# EAGLE board SipNPuff (EAGLE 9.7.0)
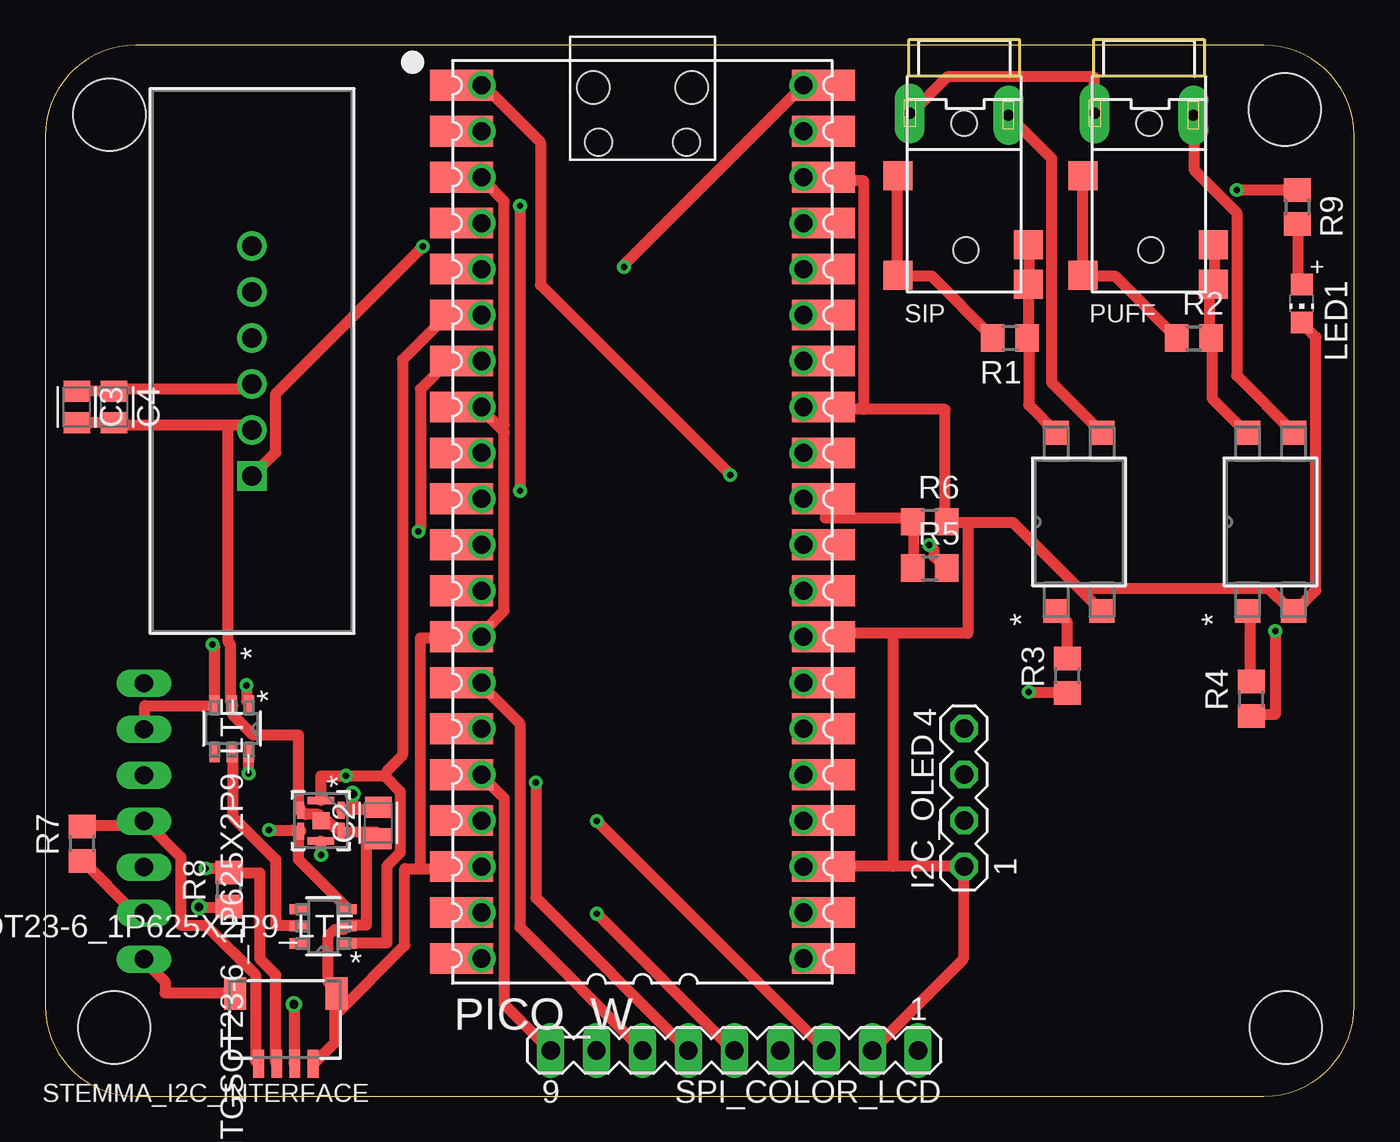
[diagram p0: board, top side]
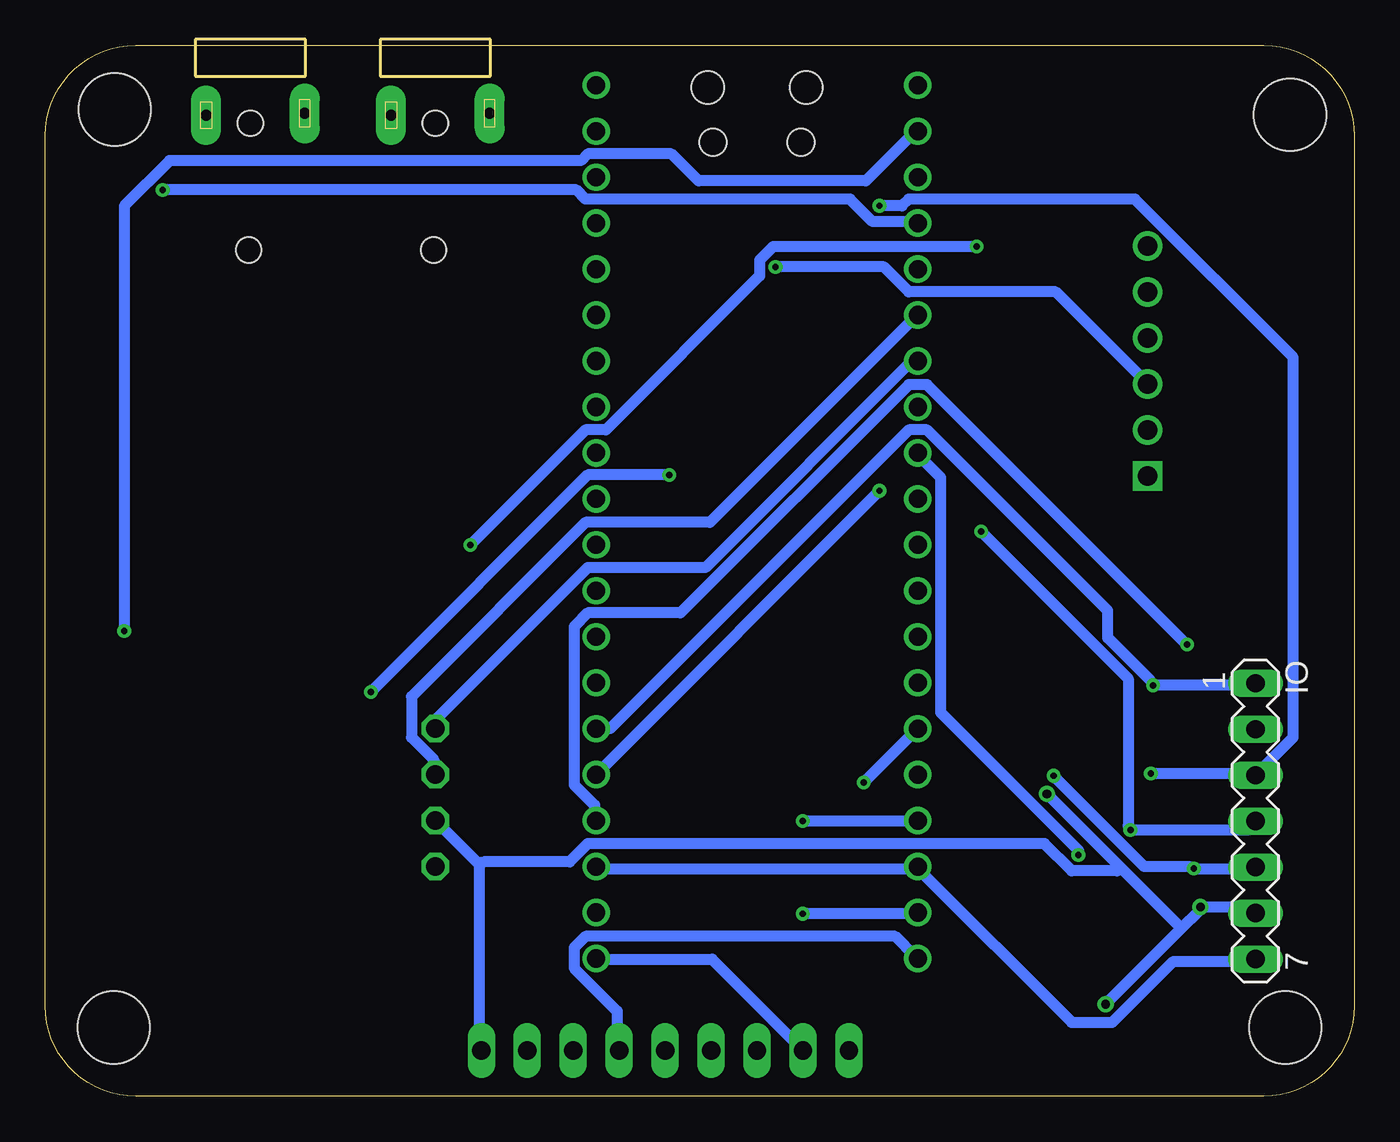
[diagram p1: board, bottom side, seen from below]

Size 72.37 x 58.09 mm. Coordinates in mm from the lower left corner, seen from the top.
Outline: 0,53.09 0,5 arc90 5,0 67.37,0 arc90 72.37,5 72.37,53.09 arc90 67.37,58.09 5,58.09 arc90 0,53.09
Copper layers (1*16): Top 0.035mm / dielectric 1.5mm / Bottom 0.035mm
Design rules "Fusion Electronics Design Rules": minimum track width 6mil, minimum drill 0.35mm, track to track 6mil, track to pad 6mil, pad to pad 6mil, via to via 6mil, smd to smd 6mil, copper to edge 40mil, drill to drill 6mil, minimum pad ring 10mil, minimum via ring 8mil, stop-mask expansion 4mil, vias tented up to drill 9999mil, thermal gap 10mil
Net classes: 1 power_2: width 0.305 mm; 3 Power: width 0.305 mm, drill 0.483 mm
Holes 4 mm at 3.81,3.81 68.58,3.81 68.53,54.54 3.55,54.25

## Footprints (pad centres in the part's own frame; a part is rotated, then mirrored left to right if it is on the bottom)
CAPC2012X110 = smd 1.165 x 1.465: 1 -0.875,0; 2 0.875,0
MA04-1 = drill 1.016 octagon: 1 1.27,1.27; 2 3.81,1.27; 3 6.35,1.27; 4 8.89,1.27
MA07-1 = drill 1.016 long: 1 -7.62,0; 2 -5.08,0; 3 -2.54,0; 4 0,0; 5 2.54,0; 6 5.08,0; 7 7.62,0
CHIP-LED0805 = smd 1.2 x 1.2: A 0,-1.05; C 0,1.05
CCLGA7_LPS28DFWTR_STM = smd 0.406 x 1.448: 1 -1.118,0; 4 1.118,0 | smd 0.94 x 0.406: 2 -0.575,-1.118; 3 0.575,-1.118; 5 0.575,1.118; 6 -0.575,1.118 | smd 0.94 x 0.94: 7 0,0
MPX5010DP_MOT = drill 1.092 pad 1.6 square: 1 0,0 | drill 1.092 pad 1.6: 2 2.54,0; 3 5.08,0; 4 7.62,0; 5 10.16,0; 6 12.7,0
PICO-PKG-NO_DEBUG = drill 1: 1 -7.62,25.4; 2 -7.62,22.86; 3 -7.62,20.32; 4 -7.62,17.78; 5 -7.62,15.24; 6 -7.62,12.7; 7 -7.62,10.16; 8 -7.62,7.62; 9 -7.62,5.08; 10 -7.62,2.54; 11 -7.62,0; 12 -7.62,-2.54; 13 -7.62,-5.08; 14 -7.62,-7.62; 15 -7.62,-10.16; 16 -7.62,-12.7; 17 -7.62,-15.24; 18 -7.62,-17.78; 19 -7.62,-20.32; 20 -7.62,-22.86; 21 10.16,-22.86; 22 10.16,-20.32; 23 10.16,-17.78; 24 10.16,-15.24; 25 10.16,-12.7; 26 10.16,-10.16; 27 10.16,-7.62; 28 10.16,-5.08; 29 10.16,-2.54; 30 10.16,0; 31 10.16,2.54; 32 10.16,5.08; 33 10.16,7.62; 34 10.16,10.16; 35 10.16,12.7; 36 10.16,15.24; 37 10.16,17.78; 38 10.16,20.32; 39 10.16,22.86; 40 10.16,25.4 | smd 3.5 x 1.7: P$1 -8.73,25.4; P$2 -8.73,22.86; P$3 -8.73,20.32; P$4 -8.73,17.78; P$5 -8.73,15.24; P$6 -8.73,12.7; P$7 -8.73,10.16; P$8 -8.73,7.62; P$9 -8.73,5.08; P$10 -8.73,2.54; P$11 -8.73,0; P$12 -8.73,-2.54; P$13 -8.73,-5.08; P$14 -8.73,-7.62; P$15 -8.73,-10.16; P$16 -8.73,-12.7; P$17 -8.73,-15.24; P$18 -8.73,-17.78; P$19 -8.73,-20.32; P$20 -8.73,-22.86; P$21 11.27,-22.86; P$22 11.27,-20.32; P$23 11.27,-17.78; P$24 11.27,-15.24; P$25 11.27,-12.7; P$26 11.27,-10.16; P$27 11.27,-7.62; P$28 11.27,-5.08; P$29 11.27,-2.54; P$30 11.27,0; P$31 11.27,2.54; P$32 11.27,5.08; P$33 11.27,7.62; P$34 11.27,10.16; P$35 11.27,12.7; P$36 11.27,15.24; P$37 11.27,17.78; P$38 11.27,20.32; P$39 11.27,22.86; P$40 11.27,25.4 | hole 1.8: -1.455,25.27; 3.995,25.27 | hole 1.5: -1.155,22.24; 3.695,22.24
PJ-332A = drill 0.6 pad 1.651 long: 1 -4.792,-3; 2 -4.692,2.45 | smd 1.6 x 1.6: 3 -1.342,-3.65; 4 2.458,3.55; 5 4.158,-3.65; 6 4.658,3.55 | hole 1.4: -4.242,0; 2.758,0.1
SL-4_DOD = smd 1.321 x 1.397: 1 -4.925,1.27; 2 -4.925,-1.27; 3 4.925,-1.27; 4 4.925,1.27
R0805 = smd 1.3 x 1.5: 1 -0.95,0; 2 0.95,0
MA09-1 = drill 1.016 long: 1 -10.16,0; 2 -7.62,0; 3 -5.08,0; 4 -2.54,0; 5 0,0; 6 2.54,0; 7 5.08,0; 8 7.62,0; 9 10.16,0
JST_SH4 = smd 0.6 x 1.55: 1 -1.5,2.006; 2 -0.5,2.006; 3 0.5,2.006; 4 1.5,2.006 | smd 1.2 x 1.8: MT1 -2.8,-1.894; MT2 2.8,-1.894
SOT23-6_1P625X2P9_LTF = smd 1.041 x 0.559: 1 -1.333,0.95; 2 -1.333,0; 3 -1.333,-0.95; 4 1.333,-0.95; 5 1.333,0; 6 1.333,0.95

## Placement (x,y rotation side)
C2  100nF  [CAPC2012X110]  18.41,15.11 90 top
C3  100nF  [CAPC2012X110]  1.75,38.1 270 top
C4  10uF 16v  [CAPC2012X110]  3.81,38.1 270 top
I2C_OLED  MA04-1  [MA04-1]  52.07,11.43 90 top
IO  [MA07-1]  5.46,15.21 270 bottom
LED1  [CHIP-LED0805]  69.47,43.81 180 top
LPS28DFWTR_SIP_N_PUFF_SENSOR  LPS28DFWTRCCLGA7_LPS28DFWTR_STM  [CCLGA7_LPS28DFWTR_STM]  15.24,15.24 270 top
MDC5010_SIP_N_PUFF_SENSOR  MPX5010DPMPX5010DP_MOT  [MPX5010DP_MOT]  11.43,34.29 90 top
PICO_W  [PICO-PKG-NO_DEBUG]  31.75,30.48 0 top
PUFF  TRRS_2SWITCH_PJ332A  [PJ-332A]  61.02,49.53 270 top
PUFF_OPTO  PC817SC/DPC817S-X-TRSL-4_DOD  [SL-4_DOD]  67.73,31.75 90 top
R1  10ohm  [R0805]  53.34,41.91 180 top
R2  10ohm  [R0805]  63.5,41.91 0 top
R3  220ohm  [R0805]  56.52,23.24 90 top
R4  220ohm  [R0805]  66.67,21.97 90 top
R5  10kohm  [R0805]  48.9,29.2 0 top
R6  20k  [R0805]  48.9,31.75 0 top
R7  10kohm  [R0805]  2.04,13.97 90 top
R8  10kohm  [R0805]  10.16,11.43 90 top
R9  220ohm  [R0805]  69.22,49.15 270 top
SIP  TRRS_2SWITCH_PJ332A  [PJ-332A]  50.8,49.53 270 top
SIP_OPTO  PC817SC/DPC817S-X-TRSL-4_DOD  [SL-4_DOD]  57.15,31.75 90 top
SPI_COLOR_LCD  [MA09-1]  38.1,2.54 180 top
STEMMA_I2C_INTERFACE  STEMMA_I2C_QT  [JST_SH4]  13.31,3.8 180 top
U1  SP724AHTGSOT23-6_1P625X2P9_LTF  [SOT23-6_1P625X2P9_LTF]  10.32,20.32 270 top
U2  SP724AHTGSOT23-6_1P625X2P9_LTF  [SOT23-6_1P625X2P9_LTF]  15.37,9.4 180 top

## Library data of the parts
C2-C4 = Capacitor; CATEGORY: Capacitor; PACKAGE_SIZE: 0805; PACKAGE_TYPE: Surface Mount; SUBCATEGORY: Ceramic Capacitors; TYPE: MLCC
I2C_OLED = SSIRacing
IO = con-lstb; OC_FARNELL: unknown; OC_NEWARK: unknown
LED1 = adafruit
LPS28DFWTR_SIP_N_PUFF_SENSOR = LPS28D; COPYRIGHT: Copyright (C) 2026 Ultra Librarian. All rights reserved.; DATASHEET: https://www.st.com/resource/en/datasheet/lps28dfw.pdf; DESCRIPTION: Dual full-scale, 1260 hPa and 4060 hPa, absolute digital output barometer with water-resistant package; MANUFACTURER_NAME: STMicroelectronics; MANUFACTURER_PART_NUMBER: LPS28DFWTR
MDC5010_SIP_N_PUFF_SENSOR = MPX5010DP; COPYRIGHT: Copyright (C) 2026 Ultra Librarian. All rights reserved.; MANUFACTURER_NAME: Motorola; MANUFACTURER_PART_NUMBER: MPX5010DP
PICO_W = Pico_Library
PUFF SIP = adafruit_electromech
PUFF_OPTO SIP_OPTO = DPC817S_X_TR; COPYRIGHT: Copyright (C) 2026 Ultra Librarian. All rights reserved.; MANUFACTURER_NAME: Diodes Inc; MANUFACTURER_PART_NUMBER: DPC817S-X-TR
R1-R9 = PulseOximeterECG_AU; SPICEPREFIX: R
SPI_COLOR_LCD = ModifidiedCon; OC_FARNELL: unknown; OC_NEWARK: unknown
STEMMA_I2C_INTERFACE = adafruit_electromech; LCSC: C2845363
U1 U2 = 2022-12-15_20-19-59_Library; COPYRIGHT: Copyright (C) 2022 Ultra Librarian. All rights reserved.; DIGI-KEY_PART_NUMBER_1: F2863TR-ND; DIGI-KEY_PART_NUMBER_2: F2863CT-ND; DIGI-KEY_PART_NUMBER_3: F2863DKR-ND; MANUFACTURER_PART_NUMBER: SP724AHTG; MFR_NAME: Littelfuse Inc

## Nets
3.3V [Power]: C2.2 I2C_OLED.2 IO.6 LPS28DFWTR_SIP_N_PUFF_SENSOR.6 R7.1 R8.1 SPI_COLOR_LCD.1 STEMMA_I2C_INTERFACE.2
3V3 [power_2]: U1.5 U2.5
3V3(OUT): PICO_W.36 PICO_W.P$36
3V3_EN: PICO_W.37 PICO_W.P$37
5V: C3.1 C4.1 MDC5010_SIP_N_PUFF_SENSOR.3 PICO_W.40 PICO_W.P$40
A_SIP_SENSOR: MDC5010_SIP_N_PUFF_SENSOR.1 R5.2
A_SIP_SENSOR_IN: PICO_W.31 PICO_W.P$31 R5.1 R6.1
ADC_REF: PICO_W.35 PICO_W.P$35
BACKLIGHT_LED: PICO_W.21 PICO_W.P$21 SPI_COLOR_LCD.8
BUTTON: IO.1 PICO_W.26 PICO_W.P$26 U1.1
CS: PICO_W.17 PICO_W.P$17 SPI_COLOR_LCD.3
DC/RS: PICO_W.19 PICO_W.P$19 SPI_COLOR_LCD.5
GND: C2.1 C3.2 C4.2 I2C_OLED.1 IO.7 LED1.C LPS28DFWTR_SIP_N_PUFF_SENSOR.2 LPS28DFWTR_SIP_N_PUFF_SENSOR.5 LPS28DFWTR_SIP_N_PUFF_SENSOR.7 MDC5010_SIP_N_PUFF_SENSOR.2 PICO_W.3 PICO_W.8 PICO_W.13 PICO_W.18 PICO_W.23 PICO_W.28 PICO_W.33 PICO_W.38 PICO_W.P$3 PICO_W.P$8 PICO_W.P$13 PICO_W.P$18 PICO_W.P$23 PICO_W.P$28 PICO_W.P$33 PICO_W.P$38 PUFF_OPTO.2 R6.2 SIP_OPTO.2 SPI_COLOR_LCD.2 STEMMA_I2C_INTERFACE.1 STEMMA_I2C_INTERFACE.MT1 STEMMA_I2C_INTERFACE.MT2 U1.2 U2.2
GND_PUFF: PUFF.2 PUFF_OPTO.3
GND_SIP: SIP.2 SIP_OPTO.3
GP0: PICO_W.1 PICO_W.P$1 R3.1
GP1: PICO_W.2 PICO_W.P$2 R4.1
GP2: PICO_W.4 PICO_W.P$4 R9.1
GP3: PICO_W.5 PICO_W.P$5
GP7: PICO_W.10 PICO_W.P$10
GP8: PICO_W.11 PICO_W.P$11
GP9: PICO_W.12 PICO_W.P$12
GP17: PICO_W.22 PICO_W.P$22
GP21: PICO_W.27 PICO_W.P$27
GP22: PICO_W.29 PICO_W.P$29
GP27: PICO_W.32 PICO_W.P$32
GP28: PICO_W.34 PICO_W.P$34
INT_DRDY: LPS28DFWTR_SIP_N_PUFF_SENSOR.4 PICO_W.9 PICO_W.P$9
MICDET: PUFF.1 SIP.1
N$1: LED1.A R9.2
PUF_ENABLE: PUFF_OPTO.1 R4.2
PUFF_RING1: PUFF.3 PUFF.5 R2.1
PUFF_TIP1: PUFF.4 PUFF.6 PUFF_OPTO.4 R2.2
RESET: PICO_W.20 PICO_W.P$20 SPI_COLOR_LCD.4
ROT_A/SIP: IO.2 PICO_W.24 PICO_W.P$24 U1.3
ROT_B/PUFF: IO.3 PICO_W.25 PICO_W.P$25 U1.6
RUN: PICO_W.30 PICO_W.P$30
SCK: PICO_W.14 PICO_W.P$14 SPI_COLOR_LCD.7
SCL: I2C_OLED.4 IO.4 LPS28DFWTR_SIP_N_PUFF_SENSOR.3 PICO_W.7 PICO_W.P$7 R7.2 STEMMA_I2C_INTERFACE.4 U2.3
SDA: I2C_OLED.3 IO.5 LPS28DFWTR_SIP_N_PUFF_SENSOR.1 PICO_W.6 PICO_W.P$6 R8.2 STEMMA_I2C_INTERFACE.3 U2.1
SDI/MOSI: PICO_W.15 PICO_W.P$15 SPI_COLOR_LCD.6
SDO/MISO: PICO_W.16 PICO_W.P$16 SPI_COLOR_LCD.9
SIP_ENABLE: R3.2 SIP_OPTO.1
SIP_RING1: R1.2 SIP.3 SIP.5
SIP_TIP1: R1.1 SIP.4 SIP.6 SIP_OPTO.4
VSYS: PICO_W.39 PICO_W.P$39

## Tracks (layer width: path | path; a pad name or v marks a point on that pad's centre or on a via)
3.3V  (via drill 0.48)
  Top 0.6: 17,15.84 18.38,15.84 18.38,15.97 C2.2 | 17,15.84 16.38,15.84 LPS28DFWTR_SIP_N_PUFF_SENSOR.6 | R7.1 2.12,12.97 4.88,10.22 5.38,10.22 IO.6 | v8.5,10.47 10.12,10.47 R8.1 | v13.75,5.09 13.75,1.84 STEMMA_I2C_INTERFACE.2 | v17,16.72 17,15.84
  Bottom 0.6: 48.38,12.84 48.38,2.59 SPI_COLOR_LCD.1 | 48.38,12.84 50.75,15.22 I2C_OLED.2 | IO.6 5.5,10.22 5.75,10.47 v8.5,10.47 8.62,10.22 9.56,9.28 | 9.56,9.28 v13.75,5.09 | 9.56,9.28 12.94,12.65 | 12.94,12.65 v17,16.72 | 48.38,12.84 48.12,12.97 43.38,12.97 42.38,13.97 17.12,13.97 15.62,12.47 13.12,12.47 12.94,12.65
3V3
  Top 0.6: U2.5 14,9.47 12.75,9.47 12.75,13.09 10.38,15.47 10.38,18.97 U1.5
3V3(OUT)
  Top 0.6: PICO_W.36 42,45.72 43,45.72 PICO_W.P$36
3V3_EN
  Top 0.6: PICO_W.37 42,48.34 43,48.34 PICO_W.P$37
5V  (via drill 0.35)
  Top 0.6: PICO_W.P$40 43,55.97 42,55.97 PICO_W.40 41.75,55.72 32,45.97 v32,45.84 | C3.1 1.75,38.97 3.75,38.97 C4.1 4,39.09 11.38,39.09 11.38,39.34 MDC5010_SIP_N_PUFF_SENSOR.3
  Bottom 0.6: v32,45.84 26,45.84 24.62,44.47 16.5,44.47 11.5,39.47 MDC5010_SIP_N_PUFF_SENSOR.3
A_SIP_SENSOR  (via drill 0.35)
  Top 0.6: v48.88,30.47 49.12,30.22 49.12,29.84 49.75,29.22 R5.2 | v20.88,46.97 12.75,38.84 12.75,35.59 11.5,34.34 MDC5010_SIP_N_PUFF_SENSOR.1
  Bottom 0.6: v48.88,30.47 42.5,36.84 41.38,36.84 32.88,45.34 32.88,46.22 32.12,46.97 v20.88,46.97
A_SIP_SENSOR_IN
  Top 0.6: R5.1 48,29.22 48,31.72 R6.1 47.75,31.97 43.12,31.97 43.12,32.97 PICO_W.P$31 42.75,33.09 42,33.09 PICO_W.31
ADC_REF
  Top 0.6: PICO_W.35 42,43.22 43,43.22 PICO_W.P$35
BACKLIGHT_LED
  Top 0.6: PICO_W.21 42,7.59 43,7.59 PICO_W.P$21
  Bottom 0.6: SPI_COLOR_LCD.8 30.5,2.59 35.5,7.59 41.88,7.59 PICO_W.21
BUTTON  (via drill 0.35)
  Top 0.6: PICO_W.26 42,20.34 43,20.34 PICO_W.P$26 | v11.12,22.72 11.12,21.84 11.25,21.72 U1.1
  Bottom 0.6: IO.1 5.5,22.72 v11.12,22.72 11.25,22.97 13.62,25.34 13.62,26.84 23.62,36.84 24.62,36.84 41.12,20.34 41.88,20.34 PICO_W.26
CS  (via drill 0.35)
  Top 0.6: PICO_W.17 24.12,15.22 23.12,15.22 PICO_W.P$17 | v30.5,15.22 43.12,2.59 SPI_COLOR_LCD.3
  Bottom 0.6: v30.5,15.22 24.25,15.22 PICO_W.17
DC/RS  (via drill 0.35)
  Top 0.6: PICO_W.19 24.12,10.22 23.12,10.22 PICO_W.P$19 | v30.5,10.09 38,2.59 SPI_COLOR_LCD.5
  Bottom 0.6: v30.5,10.09 24.25,10.09 PICO_W.19
GND
  Top 0.6: C3.2 3.75,37.22 C4.2 4,37.09 10.12,37.09 | 10.12,37.09 11.38,37.09 11.38,36.84 MDC5010_SIP_N_PUFF_SENSOR.2 | STEMMA_I2C_INTERFACE.MT2 10.5,5.72 6.62,5.72 6.62,6.34 5.5,7.47 IO.7 | PICO_W.P$3 23.12,50.84 24.12,50.84 PICO_W.3 24.25,50.59 25.38,49.47 25.38,37.09 25.19,36.9 | PICO_W.P$8 23.12,38.09 PICO_W.8 24.25,37.84 25.19,36.9 | PICO_W.18 24.12,12.72 23.12,12.72 PICO_W.P$18 22.75,12.59 20.75,12.59 | 16,4.72 16,5.59 STEMMA_I2C_INTERFACE.MT1 16,5.97 15.62,6.34 15.62,8.84 16,9.22 16.5,9.22 U2.2 16.75,9.47 17.75,9.47 17.75,14.34 C2.1 18.38,14.34 18.38,14.59 16.38,14.59 LPS28DFWTR_SIP_N_PUFF_SENSOR.5 16.12,14.84 16,14.84 15.62,15.22 15.25,15.22 LPS28DFWTR_SIP_N_PUFF_SENSOR.7 15.12,15.47 15.12,15.59 14.38,15.59 14.25,15.72 14.12,15.72 LPS28DFWTR_SIP_N_PUFF_SENSOR.2 14,16.09 14,19.97 11.5,19.97 10.38,21.09 10.38,21.59 U1.2 10.25,21.84 10.25,24.97 10.12,25.09 10.12,37.09 | 16,4.72 16,2.97 14.88,1.84 STEMMA_I2C_INTERFACE.1 | 20.75,12.59 19.88,12.59 19.88,8.34 16.25,4.72 16,4.72 | 20.75,12.59 20.75,25.34 22.75,25.34 PICO_W.P$13 23.12,25.47 24.12,25.47 PICO_W.13 24.25,25.72 25.38,26.84 25.38,36.72 25.19,36.9 | PICO_W.23 42,12.72 43,12.72 PICO_W.P$23 43.25,12.72 46.88,12.72 | SPI_COLOR_LCD.2 45.75,2.59 50.75,7.59 50.75,12.59 I2C_OLED.1 50.5,12.72 46.88,12.72 | LED1.C 69.5,42.72 70.25,41.97 70.25,27.97 69.12,26.84 PUFF_OPTO.2 68.75,26.97 67.62,28.09 57.5,28.09 57.31,27.9 | PICO_W.38 42,50.84 43,50.84 PICO_W.P$38 43.25,50.59 45.25,50.59 45.25,37.97 | PICO_W.33 42,38.09 43,38.09 PICO_W.P$33 43.25,37.97 45.25,37.97 | PICO_W.28 42,25.47 43,25.47 PICO_W.P$28 43.25,25.59 46.88,25.59
  Top 0.6: 57.31,27.9 53.5,31.72 51,31.72 | 57.31,27.9 58.38,26.84 SIP_OPTO.2 | 51,31.72 49.88,31.72 R6.2 49.75,31.97 49.75,37.97 45.25,37.97 | 46.88,25.59 51,25.59 51,31.72 | 46.88,25.59 46.88,12.72
  Bottom 0.6: IO.7 5.5,7.47 10,7.47 13.38,4.09 15.62,4.09 24.12,12.59 PICO_W.18 24.38,12.59 41.88,12.59 PICO_W.23
GND_PUFF
  Top 0.6: PUFF_OPTO.3 69,36.72 65.88,39.84 65.88,48.84 63.5,51.22 63.5,54.22 PUFF.2
GND_SIP
  Top 0.6: SIP_OPTO.3 58.38,36.72 55.62,39.47 55.62,51.84 SIP.2
GP0  (via drill 0.35)
  Top 0.6: v54.38,22.34 56.5,22.34 R3.1 | v37.88,34.34 27.38,44.84 27.38,52.72 24.25,55.84 PICO_W.P$1 24.25,55.97 PICO_W.1
  Bottom 0.6: v54.38,22.34 42.38,34.34 v37.88,34.34
GP1  (via drill 0.35)
  Top 0.6: v68,25.72 68,21.09 66.75,21.09 R4.1 | PICO_W.2 PICO_W.P$2
  Bottom 0.6: v68,25.72 68,49.22 65.5,51.72 42.75,51.72 42.38,52.09 37.75,52.09 36.25,50.59 27,50.59 24.25,53.34 PICO_W.2
GP2  (via drill 0.35)
  Top 0.6: v65.88,50.09 69.12,50.09 R9.1 | PICO_W.P$4 23.12,48.34 24.12,48.34 PICO_W.4
  Bottom 0.6: v65.88,50.09 43,50.09 42.5,49.59 27.88,49.59 26.62,48.34 24.25,48.34 PICO_W.4
GP3
  Top 0.6: PICO_W.5 23.12,45.72 PICO_W.P$5
GP7
  Top 0.6: PICO_W.10 24.12,33.09 23.12,33.09 PICO_W.P$10
GP8
  Top 0.6: PICO_W.11 24.12,30.47 23.12,30.47 PICO_W.P$11
GP9
  Top 0.6: PICO_W.12 24.12,27.97 23.12,27.97 PICO_W.P$12
GP17
  Top 0.6: PICO_W.22 42,10.22 43,10.22 PICO_W.P$22
GP21
  Top 0.6: PICO_W.27 42,22.84 43,22.84 PICO_W.P$27
GP22
  Top 0.6: PICO_W.29 42,27.97 43,27.97 PICO_W.P$29
GP27
  Top 0.6: PICO_W.32 42,35.59 43,35.59 PICO_W.P$32
GP28
  Top 0.6: PICO_W.34 42,40.72 43,40.72 PICO_W.P$34
INT_DRDY  (via drill 0.35)
  Top 0.6: v15.25,13.34 15.25,14.09 LPS28DFWTR_SIP_N_PUFF_SENSOR.4 | PICO_W.P$9 23.12,35.59 24.12,35.59 PICO_W.9
  Bottom 0.6: v15.25,13.34 15.25,13.59 22.88,21.22 22.88,34.22 24.12,35.47 PICO_W.9
MICDET
  Top 0.6: SIP.1 47.88,54.34 49.88,56.34 58,56.34 58,54.34 PUFF.1
N$1
  Top 0.6: LED1.A 69.38,44.97 69.25,45.09 69.25,48.09 R9.2
PUF_ENABLE
  Top 0.6: PUFF_OPTO.1 66.5,26.72 66.62,26.59 66.62,22.97 R4.2
PUFF_RING1
  Top 0.6: R2.1 62.5,41.97 59.12,45.34 57.38,45.34 PUFF.5 57.38,45.59 57.38,50.84 PUFF.3
PUFF_TIP1
  Top 0.6: PUFF.4 64.62,46.97 64.62,44.97 PUFF.6 64.5,44.59 64.38,44.47 64.38,42.22 R2.2 64.5,41.84 64.5,38.59 66.38,36.72 PUFF_OPTO.4
RESET
  Top 0.6: PICO_W.20 24.12,7.59 23.12,7.59 PICO_W.P$20
  Bottom 0.6: SPI_COLOR_LCD.4 40.75,2.59 40.75,4.72 43.12,7.09 43.12,8.22 42.5,8.84 25.38,8.84 24.25,7.72 PICO_W.20
ROT_A/SIP  (via drill 0.35)
  Top 0.6: PICO_W.24 42,15.22 43,15.22 PICO_W.P$24 | IO.2 5.5,20.34 5.5,21.59 9.25,21.59 U1.3 9.38,21.97 9.38,24.84 v9.25,24.97
  Bottom 0.6: v9.25,24.97 23.62,39.34 24.62,39.34 37.25,26.72 42.38,26.72 43.12,25.97 43.12,17.22 42,16.09 42,15.34 PICO_W.24
ROT_B/PUFF  (via drill 0.35)
  Top 0.6: PICO_W.25 42,17.84 43,17.84 PICO_W.P$25 | v11.25,17.84 11.25,18.97 U1.6 | v26.25,49.22 v26.25,33.47
  Bottom 0.6: v11.25,17.84 5.5,17.84 IO.3 5.25,17.97 3.38,19.84 3.38,40.84 12.12,49.59 24.62,49.59 25,49.22 v26.25,49.22 | v26.25,33.47 41.88,17.84 PICO_W.25
RUN
  Top 0.6: PICO_W.30 42,30.47 43,30.47 PICO_W.P$30
SCK
  Top 0.6: PICO_W.P$14 23.12,22.84 24.12,22.84 PICO_W.14 24.25,22.59 26.25,20.59 26.25,9.34 33,2.59 SPI_COLOR_LCD.7
SCL  (via drill 0.35)
  Top 0.6: 14,14.59 14,13.09 16.62,10.47 U2.3 | 14,14.59 LPS28DFWTR_SIP_N_PUFF_SENSOR.3 | R7.2 2.12,14.97 5.38,14.97 5.38,15.09 IO.4 5.62,15.09 7.5,13.22 7.5,9.47 8.88,9.47 11.62,6.72 11.62,1.97 11.75,1.84 STEMMA_I2C_INTERFACE.4 | v12.38,14.72 13.75,14.72 14,14.59 | PICO_W.7 24.12,40.72 23.12,40.72 PICO_W.P$7 22.75,40.59 22.25,40.59 20.75,39.09 20.75,31.34 v20.62,31.22
  Bottom 0.6: IO.4 5.5,15.09 5.88,14.72 v12.38,14.72 12.5,14.97 12.5,23.09 v20.62,31.22 | I2C_OLED.4 50.75,20.34 50.75,20.84 42.38,29.22 35.88,29.22 24.5,40.59 24.25,40.59 PICO_W.7
SDA  (via drill 0.35)
  Top 0.6: STEMMA_I2C_INTERFACE.3 12.75,1.84 12.75,6.72 11.88,7.59 11.88,12.34 10.25,12.34 R8.2 10,12.59 v8.88,12.59 | 18.75,17.72 19.62,16.84 19.62,13.47 18.88,12.72 18.88,8.47 16.75,8.47 U2.1 | 18.75,17.72 v16.62,17.72 15.25,17.72 15.25,16.47 LPS28DFWTR_SIP_N_PUFF_SENSOR.1 | PICO_W.6 24.12,43.22 23.12,43.22 PICO_W.P$6 22.75,43.09 22.12,43.09 19.75,40.72 19.75,18.84 18.88,17.97 18.75,17.72
  Bottom 0.6: IO.5 5.5,12.59 v8.88,12.59 9.12,12.72 11.62,12.72 v16.62,17.72 | I2C_OLED.3 50.88,17.84 50.88,18.59 52.12,19.84 52.12,22.09 42.5,31.72 35.62,31.72 24.25,43.09 PICO_W.6
SDI/MOSI  (via drill 0.35)
  Top 0.6: PICO_W.15 24.12,20.34 23.12,20.34 PICO_W.P$15 | v27.12,17.34 27.12,10.97 35.5,2.59 SPI_COLOR_LCD.6
  Bottom 0.6: v27.12,17.34 24.25,20.22 PICO_W.15
SDO/MISO
  Top 0.6: PICO_W.P$16 23.12,17.84 24.12,17.84 PICO_W.16 24.25,17.59 25.38,16.47 25.38,5.09 27.88,2.59 SPI_COLOR_LCD.9
SIP_ENABLE
  Top 0.6: SIP_OPTO.1 56,26.72 56.5,26.22 56.5,24.22 R3.2
SIP_RING1
  Top 0.6: R1.2 52.38,41.97 49,45.34 47.25,45.34 SIP.5 47.12,45.59 47.12,50.84 SIP.3
SIP_TIP1
  Top 0.6: SIP.4 54.38,46.97 54.38,44.97 SIP.6 54.38,44.59 54.38,42.22 R1.1 54.38,41.84 54.38,38.22 55.88,36.72 SIP_OPTO.4
VSYS
  Top 0.6: PICO_W.P$39 PICO_W.39